# Altium PCB PCB1.PcbDoc
Units mil, origin at the board's own origin, x right, y up, seen from the top; angles counter-clockwise.
Board outline 385 x 743 mil, 2 copper layers (Top Layer, Bottom Layer); 6 components, 7 nets, 35 pads, 15 vias.
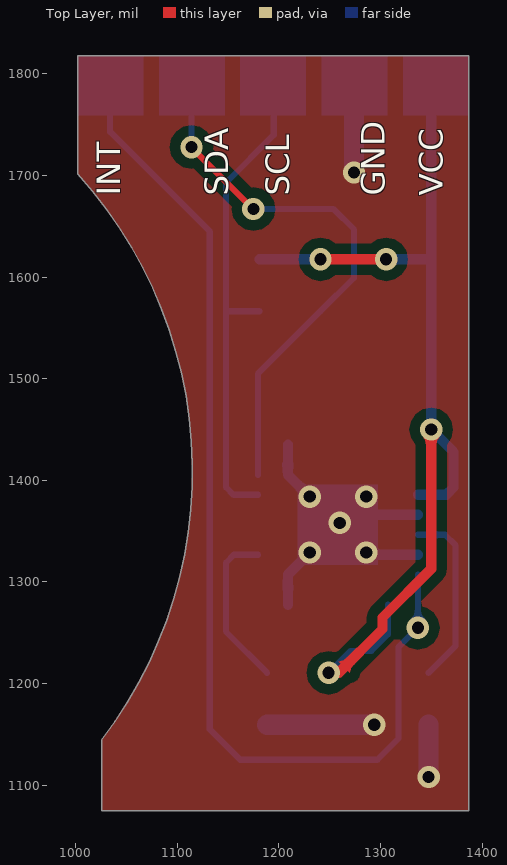
[diagram p0: Top Layer view]
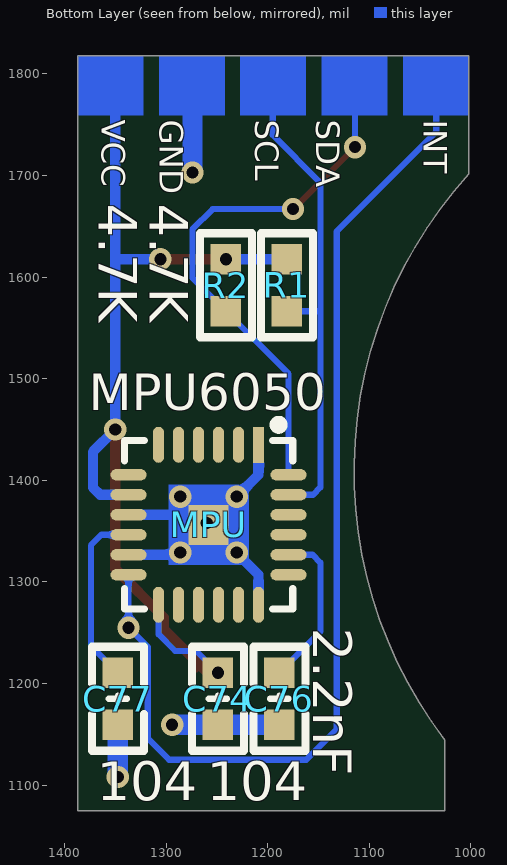
[diagram p1: Bottom Layer view, seen from below]
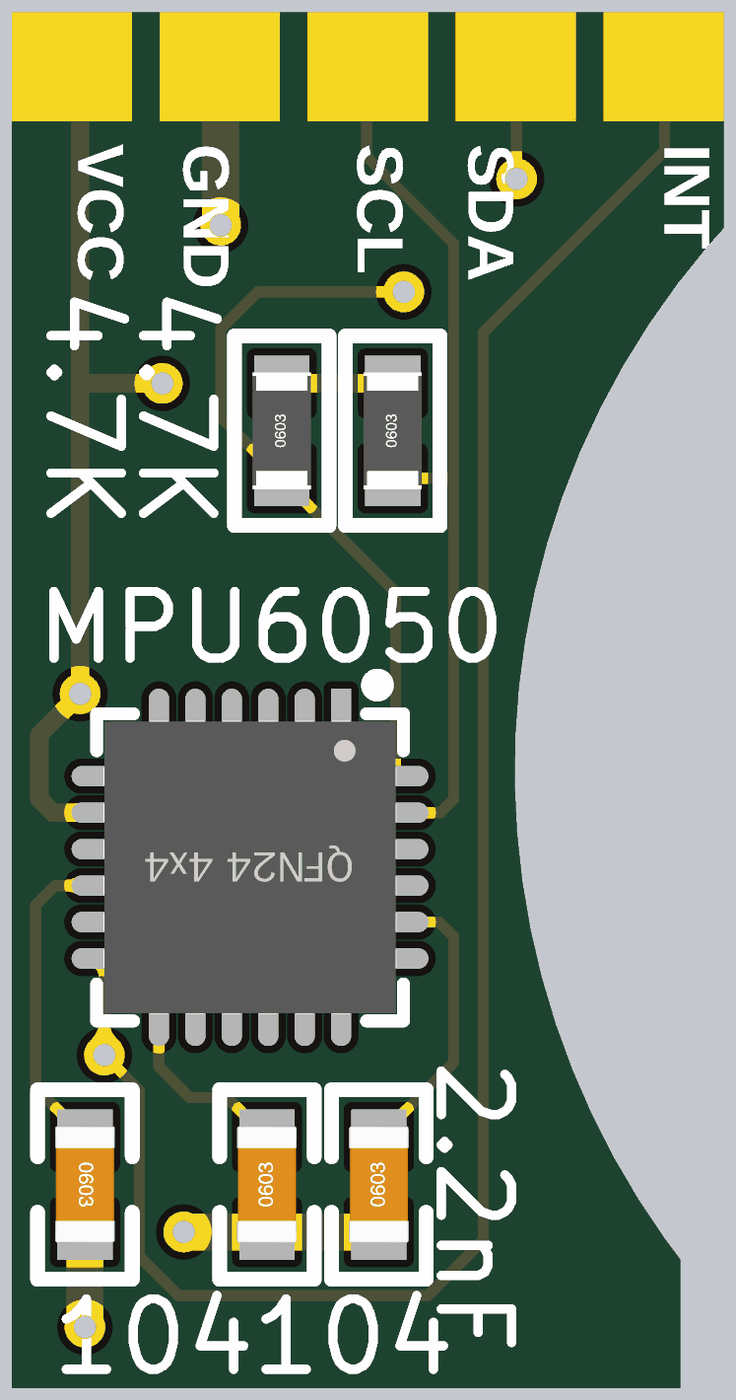
[diagram p2: 3D render of the assembled board from below, using the file's embedded part models]

## Layer stack, top to bottom
Top Solder: solder mask 0.4, Solder Resist, Dk 3.5
Top Layer: signal copper 1.4
Dielectric 1: dielectric 12.6, FR-4, Dk 4.8
Bottom Layer: signal copper 1.4
Bottom Solder: solder mask 0.4, Solder Resist, Dk 3.5

## Board outline
1025.56,1075 1025.56,1144.58 ccw(c679.77,1408.9) 1002,1701.47 1002,1818 1387,1818 1387,1075

## Design rules (kind name [scope] priority, off if disabled: settings)
Clearance [All] p1: gap=10
PlaneConnect [All] p1: planeconnectstyle=Direct reliefexpansion=20 reliefentries=4 reliefconductorwidth=10 reliefairgap=10
PolygonConnect [All] p1: connectstyle=Direct reliefconductorwidth=10 reliefentries=4 polygonreliefangle="90 Angle" airgapwidth=10
RoutingVias [All] p1: holewidth=12 width=22 viastyle="Through Hole" minholewidth=12 minwidth=22 maxholewidth=200 maxwidth=500
SolderMaskExpansion [All] p1: expansion=4
Width [All] p1: maxlimit=200 minlimit=6 preferedwidth=10 minimp=50.000000 maximp=50.000000 favimp=50.000000
29 further rules are at their usual default settings.

## Classes and differential pairs
component class Sheet1: C76 C77 MPU R1 R2

## Components (designator, comment, footprint, x,y, rotation, side; value= is the part's Value field where it differs from the comment)
C74 "104" "C 0603_L" 1249,1185 r90 bottom
C76 "2.2nF" "C 0603_L" 1188.5,1185 r90 bottom
C77 "104" "C 0603_L" 1347.41,1184.99 r270 bottom
MPU "MPU6050" "QFN24 4x4_N" 1258.16,1356.26 r0 bottom
R1 "4.7K" "R 0603_L" 1181,1592 r90 bottom
R2 "4.7K" "R 0603_L" 1241,1592 r90 bottom

## Footprints (in the part's own frame and the unit in brackets; to place one, negate y for a bottom-side part, rotate by r counter-clockwise, add the part's x,y. Pads: shape width x height; smd on the part's side, far side on the other; paste and mask are expansions set on the pad)
"C 0603_L" [mil] "无极性贴片电容"
  rect 30x30 smd: 1(-25.59,0) 2(25.59,0)
  silkscreen extent -51,-26 51,26, body extent -31,-16 31,16, height 32
"QFN24 4x4_N" [mm] "24脚，长x宽x高：4x4x1mm，脚距：0.5mm"
  rect 0.28x0.9 smd: 1(-1.25,-2)
  oval 0.28x0.9 smd: 2(-0.75,-2) 3(-0.25,-2) 4(0.25,-2) 5(0.75,-2) 6(1.25,-2) 13(1.25,2) 14(0.75,2) 15(0.25,2) 16(-0.25,2) 17(-0.75,2) 18(-1.25,2)
  oval 0.9x0.28 smd: 7(2,-1.25) 8(2,-0.75) 9(2,-0.25) 10(2,0.25) 11(2,0.75) 12(2,1.25) 19(-2,1.25) 20(-2,0.75) 21(-2,0.25) 22(-2,-0.25) 23(-2,-0.75) 24(-2,-1.25)
  rect 1x1 smd: 25(0,0)
  Top Layer region: -1,1 1,1 1,-1 -0.75,-1 -1,-0.75
  silkscreen extent -2.11,-2.6 2.11,2.11, body extent -2.01,-2.01 2.01,2.01, height 0.95
"R 0603_L" [mil] "1/10W贴片电阻"
  rect 30x30 smd: 1(-25.59,0) 2(25.59,0)
  silkscreen extent -51,-26 51,26, body extent -31,-16 31,16, height 16

## Part data
C74 C76 C77: library part C
MPU: "9轴运动处理传感器"
R1 R2: library part R

## Via types
v1: diameter 22, hole 12, Top Layer to Bottom Layer, 15 vias

## Nets (pads, with @x,y where several pads share a name; then routed paths per layer and width w, separated by ;. In a path a pad name is that pad's centre, name@x,y a point inside that pad or via, vN(x,y) a via of type N, cw(c..) or ccw(c..) an arc to the next point about the centre after c; other vN are vias at no path point)
3D_INT: MPU.12 | length 1049.6
  Bottom Layer w6: 1034,1788 1034,1743 1132,1645 1132,1155 1162,1125 1297,1125 1318,1146 1318,1236 v1(1336.9,1254.9) MPU.12
GND: C74.1 C76.1 C77.2 MPU.1 MPU.9 MPU.11 MPU.18 MPU.25 | length 613
  Bottom Layer w10: MPU.18 1208.94,1307.05 MPU.25 ; MPU.1 1208.94,1405.47 v1(1230.42,1384) MPU.25 ; MPU.11 1287.68,1326.73 MPU.25 ; MPU.9 1268,1366.1 v1(1260,1358.1) MPU.25
  Bottom Layer w20: C76.1 v1(1294,1159.41) ; v1(1274,1703) 1274,1787 ; v1(1347.41,1108) C77.2
  other v1: 1230.42,1329 1286,1329 1286,1384
IIC_SCL: MPU.23 R1.1 | length 478.9
  Bottom Layer w6: MPU.23 1155.21,1385.79 1148,1393 1148,1566.41 ; R1.1 1148,1566.41 ; 1195,1785 1195,1740 1148,1693 1148,1566.41
IIC_SDA: MPU.24 R2.1 | length 535.3
  Top Layer w6: v1(1114,1728) v1(1175,1667)
  Bottom Layer w6: v1(1114,1728) 1114,1789 ; v1(1175,1667) 1254,1667 1274,1647 1274,1599.41 R2.1 1179.42,1504.83 MPU.24
NetC76_2: C76.2 MPU.20 | length 159.8
  Bottom Layer w6: MPU.20 1155.73,1326.73 1148,1319 1148,1251.08 C76.2
NetC77_1: C77.1 MPU.10 | length 177.8
  Bottom Layer w6: MPU.10 1363.58,1346.42 1374,1336 1374,1237.18 C77.1
VCC3.3: C74.2 MPU.8 MPU.13 R1.2 R2.2 | length 988.7
  Top Layer w10: v1(1241,1617.59) v1(1305.59,1617.59) ; v1@1259,1210.59 1302,1253.59 1302,1265 1350,1313 v1(1350,1450)
  Bottom Layer w6: v1(1249,1210.59) 1270.41,1232 1291,1232 1307.37,1248.37 MPU.13
  Bottom Layer w10: R1.2 v1(1241,1617.59) ; v1(1305.59,1617.59) 1349.41,1617.59 1350,1617 ; MPU.8 1364.79,1385.79 1372,1393 1372,1428 v1(1350,1450) 1350,1617 ; 1350,1785 1350,1617
pads on no net: MPU.2 MPU.3 MPU.4 MPU.5 MPU.6 MPU.7 MPU.14 MPU.15 MPU.16 MPU.17 MPU.19 MPU.21 MPU.22

## Polygon pours and split planes (outlines as drawn)
GND on Top Layer "AutoNaming" (solid, remove dead copper, pour order 1): 1025.56,1144.58 ccw(c679.77,1408.9) 1002,1701.47 1002,1818 1387,1818 1387,1075 1025.56,1075

## Other copper
Bottom Layer:
  rectangle net 3D_INT: 1002,1759 1067,1818
  rectangle net IIC_SDA: 1082,1759 1147,1818
  rectangle net IIC_SCL: 1162,1759 1227,1818
  rectangle net GND: 1242,1759 1307,1818
  rectangle net VCC3.3: 1322,1759 1387,1818

## Silkscreen, mask and mechanical layers (free items; w line width, h text height)
Top Overlay:
  text "INT" at 1052,1680.07 h40 r90
  text "SDA" at 1158,1680 h40 r90
  text "SCL" at 1218,1680 h40 r90
  text "GND" at 1312,1680.07 h40 r90
  text "VCC" at 1369,1680.07 h40 r90
Bottom Overlay:
  text "INT" at 1054,1754.93 h40 r90
  text "SDA" at 1160,1755 h40 r90
  text "SCL" at 1220,1755 h40 r90
  text "GND" at 1314,1754.93 h40 r90
  text "VCC" at 1371,1754.93 h40 r90
Top Solder:
  region: 1387,1818 1322,1818 1322,1759 1387,1759
  region: 1307,1818 1242,1818 1242,1759 1307,1759
  region: 1227,1818 1162,1818 1162,1759 1227,1759
  region: 1147,1818 1082,1818 1082,1759 1147,1759
  region: 1067,1818 1002,1818 1002,1759 1067,1759
Bottom Solder:
  rectangle: 1002,1759 1067,1818
  rectangle: 1082,1759 1147,1818
  rectangle: 1162,1759 1227,1818
  rectangle: 1242,1759 1307,1818
  rectangle: 1322,1759 1387,1818
Mechanical 1:
  the board outline again, w5